# Altium PCB PCB1.PcbDoc (part 1 of 3)
Units mm, origin at the board's own origin, x right, y up, seen from the top; angles counter-clockwise.
Board outline 395.86 x 234.82 mm, 2 copper layers (Top Layer, Bottom Layer); 284 components, 215 nets, 949 pads, 803 vias.
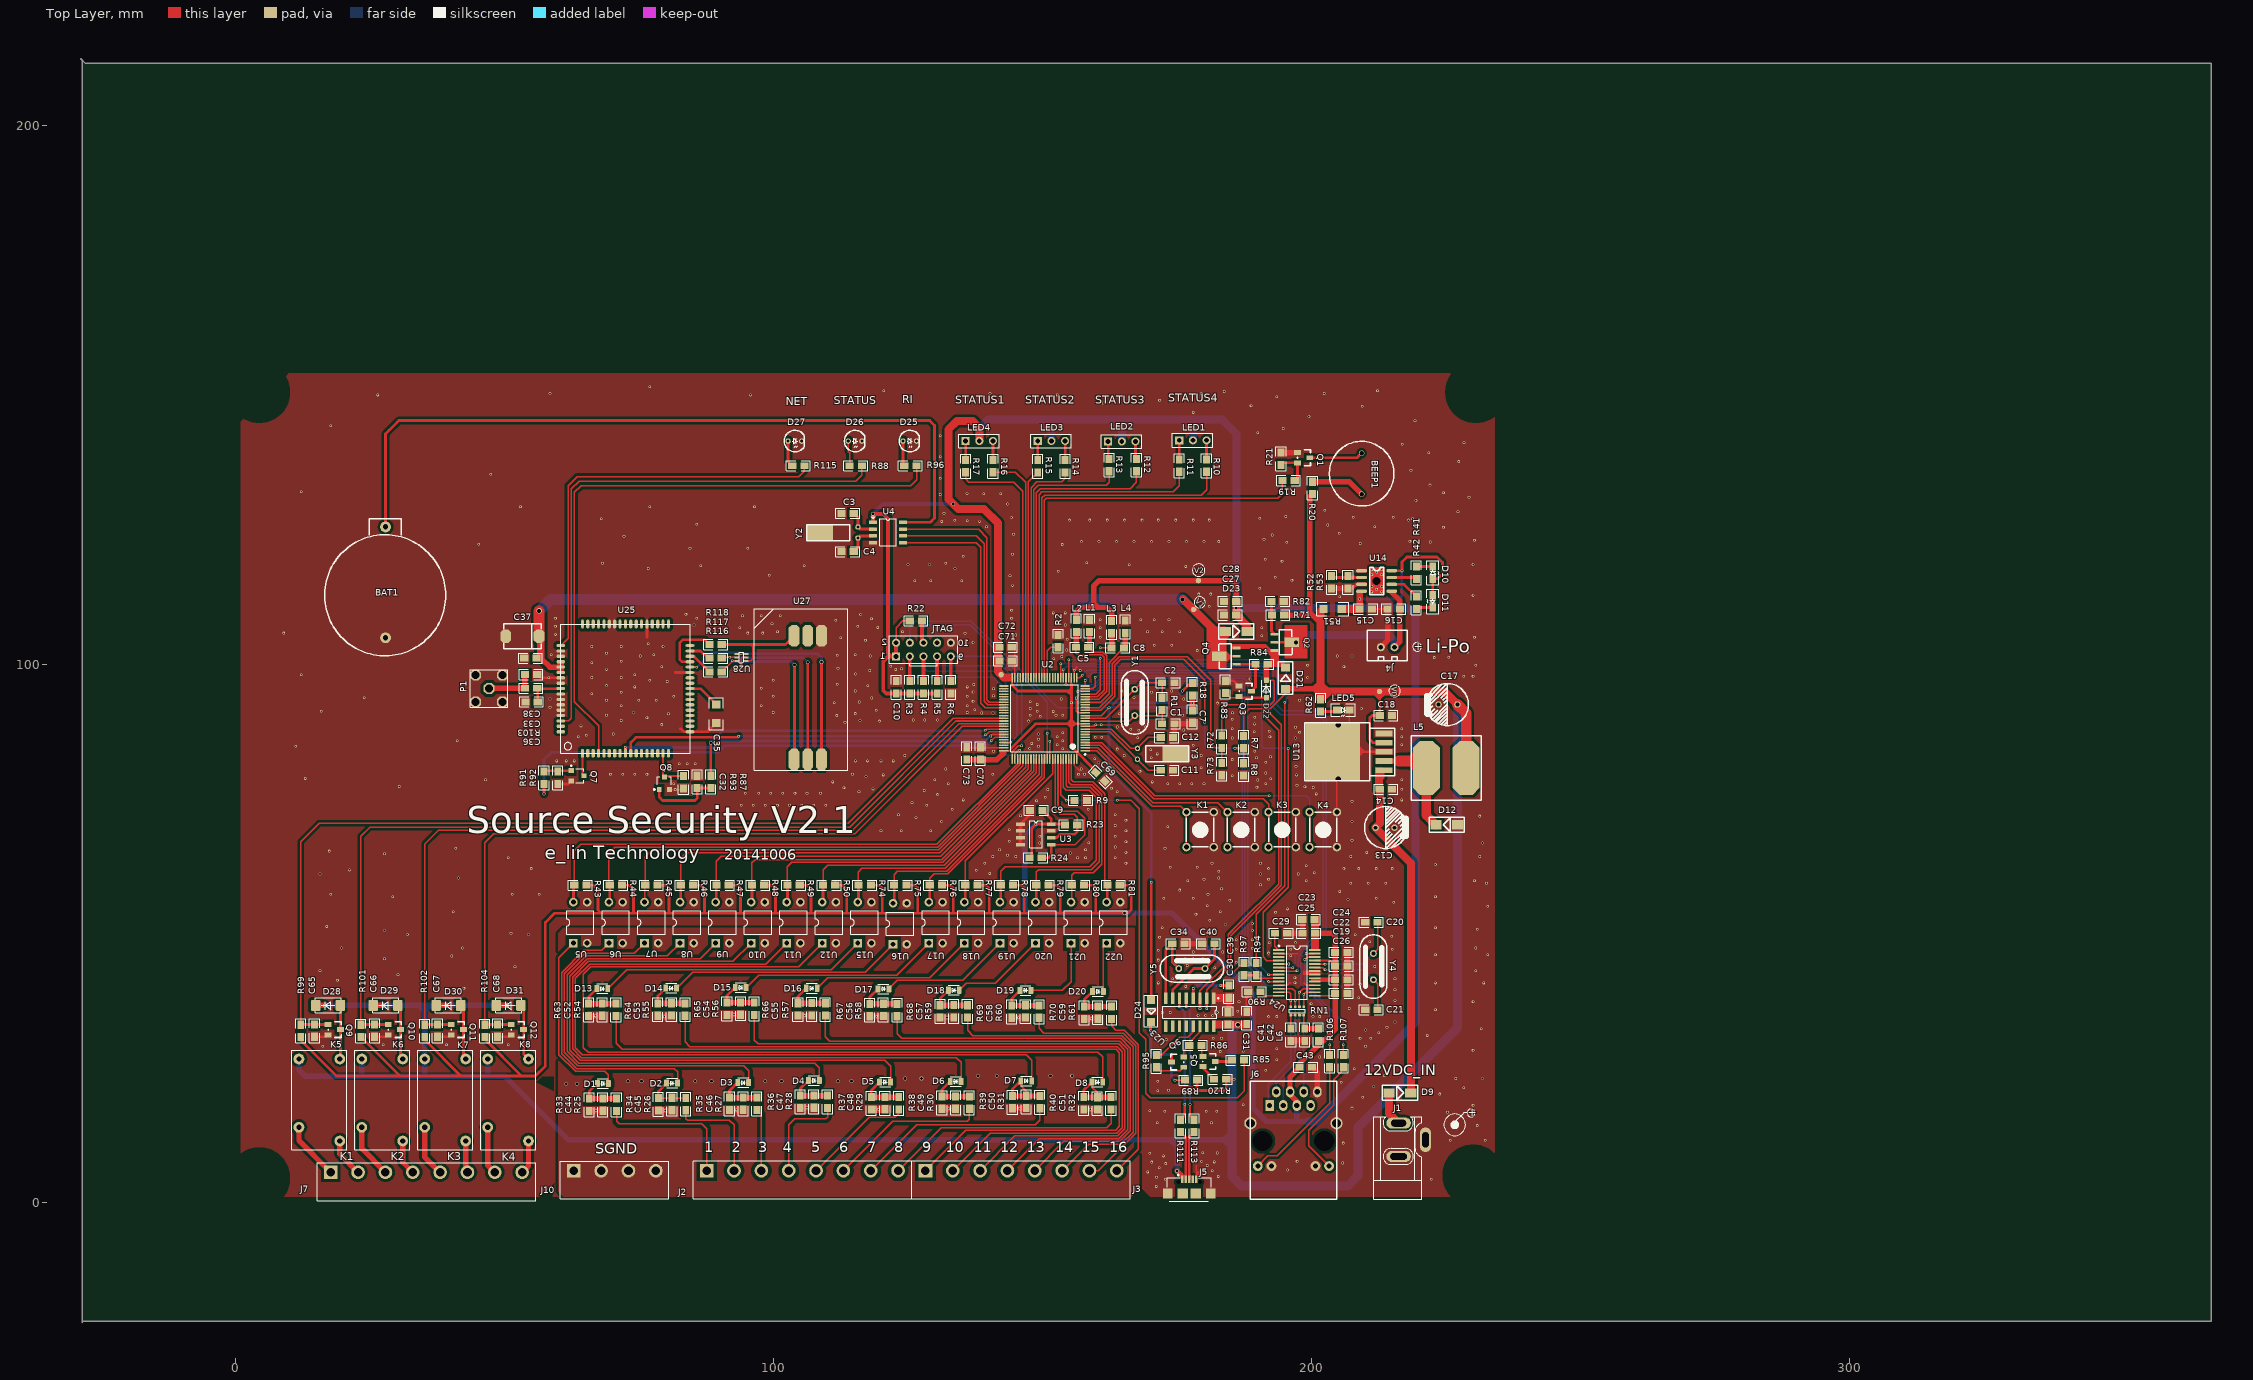
[diagram p0: Top Layer view]
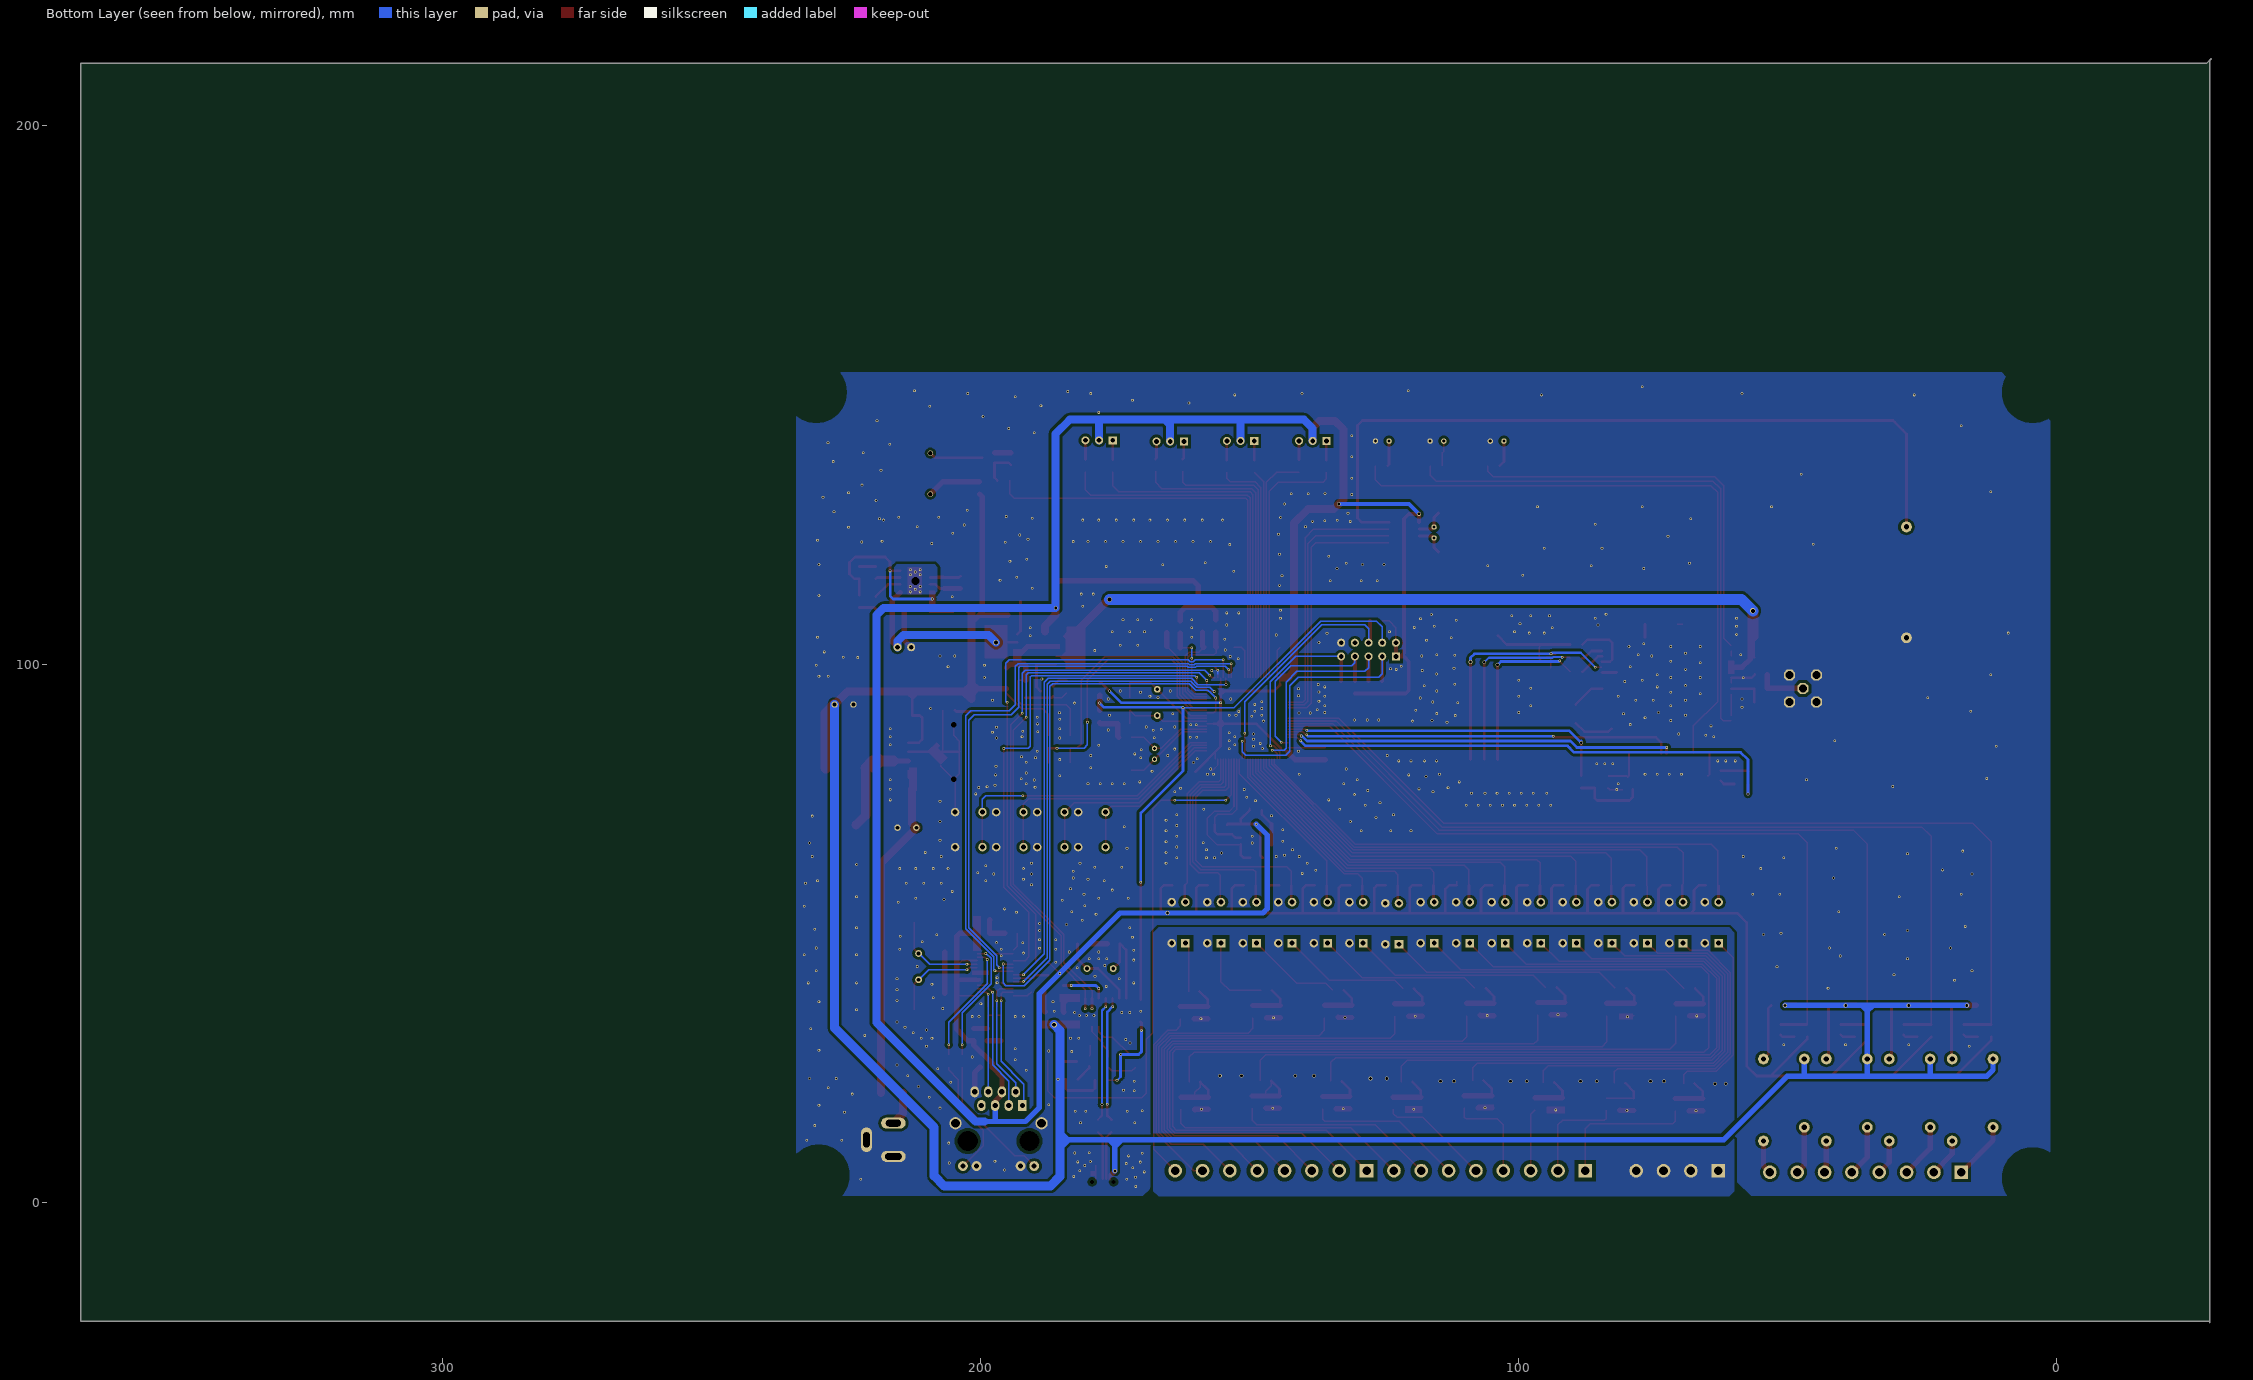
[diagram p1: Bottom Layer view, seen from below]

## Layer stack, top to bottom
Top Layer: signal copper 0.0356
Dielectric: dielectric 0.32, FR-4, Dk 4.8
Bottom Layer: signal copper 0.0356

## Board outline
-28.448,-22.352 -28.194,-22.098 367.157,-22.098 367.157,211.582 -27.813,211.582 -28.702,212.471 -28.448,212.217 -28.448,-22.352

## Design rules (kind name [scope] priority, off if disabled: settings)
Clearance [All] p1: gap=0.1
PlaneClearance [All] p1: clearance=0.7
PlaneConnect [All] p1: planeconnectstyle=Direct reliefexpansion=0.508 reliefentries=4 reliefconductorwidth=0.254 reliefairgap=0.254
PolygonConnect [All] p1: connectstyle=Direct reliefconductorwidth=0.254 reliefentries=4 polygonreliefangle="90 Angle"
RoutingVias [All] p1: holewidth=0.3 width=0.5 viastyle="Through Hole" minholewidth=0.3 minwidth=0.5 maxholewidth=0.7 maxwidth=1
SilkscreenOverComponentPads [All] p1: minsilkscreentomaskgap=0.254
SolderMaskExpansion [All] p1: expansion=0.102
Width [All] p1: maxlimit=5 minlimit=0.254 preferedwidth=0.254
25 further rules are at their usual default settings.

## Components (designator, comment, footprint, x,y, rotation, side; value= is the part's Value field where it differs from the comment)
BAT1 "BATT" CR2032 27.94,125.476 r0 top locked
BEEP1 "BEEP" BEEP-12 209.296,131.572 r90 top locked
C1 "22p" 0805 172.212,88.9 r0 top locked
C2 "22p" 0805 172.212,96.52 r0 top locked
C3 "104" 0805 112.656,127.996 r0 top locked
C4 "104" 0805 112.656,120.884 r0 top locked
C5 "104" 0805 158.496,103.124 r180 top locked
C7 "104" 0805 177.848,89.091 r90 top locked
C8 "104" 0805 162.844,102.996 r0 top locked
C9 "104" 0805 149.988,72.81 r180 top locked
C10 "104" 0805 122.82,94.548 r90 top locked
C11 "104" 0805 174.244,80.264 r180 top locked
C12 "104" 0805 174.244,86.36 r180 top locked
C13 "220uF" RB3.5 215.392,69.596 r180 top locked
C14 "0.1uF" 0805 214.952,76.732 r180 top locked
C15 "10uF/25V" 0805 208.915,110.236 r0 top locked
C16 "10uF/25V" 0805 216.408,110.236 r180 top locked
C17 "470uF" RB3.5 223.588,92.48 r0 top locked
C18 "0.1uF" 0805 214.952,90.448 r180 top locked
C19 "0.1uF" 0805 204.368,41.348 r0 top locked
C20 "20pF" 0805 209.956,52.016 r0 top locked
C21 "20pF" 0805 209.956,35.76 r0 top locked
C22 "0.1uF" 0805 204.368,43.888 r0 top locked
C23 "10uF" 0805 198.272,52.524 r0 top locked
C24 "0.1uF" 0805 204.368,46.428 r0 top locked
C25 "0.1uF" 0805 200.6,49.984 r180 top locked
C26 "0.1uF" 0805 204.368,38.808 r0 top locked
C27 "10uF/25V" 0805 186.012,109.098 r180 top locked
C28 "0.1uF" 0805 186.012,111.638 r180 top locked
C29 "10uF" 0805 193.192,49.984 r0 top locked
C30 "10uF" 0805 184.464,35.292 r270 top locked
C31 "0.1uF" 0805 187.96,35.392 r270 top locked
C32 "104" 0805 83.296,76.9 r90 top locked
C33 "NC" 0805 53.832,98.044 r0 top locked
C34 "22pF" 0805 176.38,48.044 r180 top locked
C35 "10uF/25V" 1206 89.392,92.456 r270 top locked
C36 "NC" 0805 56.2,92.964 r180 top locked
C37 "1000uF/6.3V" 7343 56.372,105.156 r180 top locked
C38 "0.1uF" 0805 56,101.092 r180 top locked
C39 "0.1uF" 0805 184.62,38 r90 top locked
C40 "22pF" 0805 181.968,48.044 r180 top locked
C41 "0.01uF" 0805 196.18,32.276 r270 top locked
C42 "0.01uF" 0805 198.72,32.276 r270 top locked
C43 "0.1uF" 0805 197.764,25.092 r0 top locked
C44 "0.1uF" 0805 68.32,19.282 r270 top locked
C45 "0.1uF" 0805 81.172,19.4 r270 top locked
C46 "0.1uF" 0805 94.384,19.458 r270 top locked
C47 "0.1uF" 0805 107.524,19.834 r270 top locked
C48 "0.1uF" 0805 120.744,19.558 r270 top locked
C49 "0.1uF" 0805 133.864,19.658 r270 top locked
C50 "0.1uF" 0805 146.972,19.808 r270 top locked
C51 "0.1uF" 0805 160.188,19.5 r270 top locked
C52 "0.1uF" 0805 68.216,36.934 r270 top locked
C53 "0.1uF" 0805 81.064,36.966 r270 top locked
C54 "0.1uF" 0805 93.916,37.134 r270 top locked
C55 "0.1uF" 0805 107.116,37.002 r270 top locked
C56 "0.1uF" 0805 120.44,36.882 r270 top locked
C57 "0.1uF" 0805 133.508,36.634 r270 top locked
C58 "0.1uF" 0805 146.836,36.59 r270 top locked
C59 "0.1uF" 0805 160.292,36.39 r270 top locked
C65 "0.1uF" 0805 14.732,33.02 r270 top locked
C66 "0.1uF" 0805 25.908,33.02 r270 top locked
C67 "0.1uF" 0805 37.592,33.02 r270 top locked
C68 "0.1uF" 0805 48.768,33.02 r270 top locked (schematic designator C568)
C69 "0.1uF" 0805 161.544,78.232 r135 top locked
C70 "0.1uF" 0805 138.455,84.531 r270 top locked
C71 "0.1uF" 0805 144.272,100.584 r180 top locked
C72 "10uF/25V" 0805 144.272,103.124 r180 top locked
C73 "10uF/25V" 0805 135.915,84.531 r270 top locked
D1 "LED-R" 0805-LED 68.32,22.064 r0 top locked
D2 "LED-R" 0805-LED 81.172,22.14 r0 top locked
D3 "LED-R" 0805-LED 94.384,22.24 r0 top locked
D4 "LED-R" 0805-LED 107.524,22.616 r0 top locked
D5 "LED-R" 0805-LED 120.744,22.34 r0 top locked
D6 "LED-R" 0805-LED 133.864,22.44 r0 top locked
D7 "LED-R" 0805-LED 146.972,22.548 r0 top locked
D8 "LED-R" 0805-LED 160.188,22.34 r0 top locked
D9 "B340" SMB 214.376,20.32 r0 top locked
D10 "RED" LED-0805 222.504,115.824 r90 top locked
D11 "GREEN" LED-0805 222.504,112.776 r270 top locked
D12 "B340" SMB 227.144,70.128 r180 top locked
D13 "LED-R" 0805-LED 68.216,39.7 r0 top locked
D14 "LED-R" 0805-LED 81.004,39.78 r0 top locked
D15 "LED-R" 0805-LED 93.916,39.9 r0 top locked
D16 "LED-R" 0805-LED 107.116,39.768 r0 top locked
D17 "LED-R" 0805-LED 120.44,39.648 r0 top locked
D18 "LED-R" 0805-LED 133.524,39.4 r0 top locked
D19 "LED-R" 0805-LED 146.836,39.356 r0 top locked
D20 "LED-R" 0805-LED 160.292,39.156 r0 top locked
D21 "IN4007" SMA(DO-214AC) 195.156,95.382 r90 top locked
D22 "2.7V" sod-123 191.6,95.382 r90 top locked
D23 "B340" SMB 183.98,106.05 r0 top locked
D24 "IN4148" SOD-23 170.18,38.608 r270 top locked
D25 "LED-R" LED-DIP 124.312,141.424 r0 top locked
D26 "LED-R" LED-DIP 114.152,141.424 r0 top locked
D27 "LED-R" LED-DIP 102.976,141.424 r0 top locked
D28 "1N4007" DO-214AC(SMA) 17.272,36.576 r180 top locked
D29 "1N4007" DO-214AC(SMA) 27.94,36.576 r180 top locked
D30 "1N4007" DO-214AC(SMA) 39.624,36.576 r180 top locked
D31 "1N4007" DO-214AC(SMA) 50.8,36.576 r180 top locked
J1 "POWER" DC10B 220.472,4.064 r90 top locked
J2 "2EDGR-5.08-8P" 2EDGR-5.08-8P 85.104,7.62 r0 top locked
J3 "2EDGR-5.08-8P" 2EDGR-5.08-8P 125.744,7.62 r0 top locked
J4 "SIP2A-2.54" 2.54 210.312,100.584 r0 top locked
J5 "microb usb" USB_micro 177.252,1.624 r0 top locked
J6 "HR911105A" HR911105A 192.176,17.98 r270 top locked
J7 "2EDGR-5.08-8P" 2EDGR-5.08-8P 15.256,7.32 r0 top locked
J10 "2EDGR-5.08-4P" 2EDGR-5.08-4P 60.452,7.62 r0 top locked
JTAG "JTAG_10" JTAG_10 122.8,101.42 r0 top locked (schematic designator JTAG_1)
K1 "KEY_M" KEY_M 181.828,72.484 r270 top locked
K2 "KEY_M" KEY_M 189.448,72.484 r270 top locked
K3 "KEY_M" KEY_M 197.068,72.484 r270 top locked
K4 "KEY_M" KEY_M 204.688,72.484 r270 top locked
K5 "307" RELAY-SONGCHUAN 11.848,26.624 r270 top locked
K6 "307" RELAY-SONGCHUAN 23.532,26.624 r270 top locked
K7 "307" RELAY-SONGCHUAN 35.216,26.624 r270 top locked
K8 "307" RELAY-SONGCHUAN 46.9,26.624 r270 top locked
L1 "100uH" 0805 158.732,108.212 r270 top locked
L2 "100uH" 0805 156.296,108.228 r270 top locked
L3 "100uH" 0805 162.844,105.704 r90 top locked
L4 "100uH" 0805 165.384,108.076 r270 top locked
L5 "33uH" INDUCTOR-1212 218.508,74.7 r0 top locked
L6 "82uH" 0805 201.26,32.276 r270 top locked
LED1 "Header 3" HDR1X3 175.4,141.568 r0 top locked
LED2 "Header 3" HDR1X3 162.192,141.376 r0 top locked
LED3 "Header 3" HDR1X3 149.116,141.448 r0 top locked
LED4 "Header 3" HDR1X3 135.716,141.468 r0 top locked
LED5 "LED-R" LED-0805 204.724,91.44 r0 top locked
P1 "COAX-M" ST-TH1 43.672,91.948 r0 top locked
Q1 "3904" SOT-23 197.368,139.276 r270 top locked
Q2 "2SJ517" SOT-89 193.124,105.542 r270 top locked
Q3 "3904" SOT-23 186.52,95.89 r270 top locked
Q4 "2SJ517" SOT-89 186.012,99.954 r90 top locked
Q5 "3906" SOT-23 179.796,27.116 r270 top locked
Q6 "3904" SOT-23 176.24,25.084 r90 top locked
Q7 "3904" SOT-23R 63.484,79.248 r270 top locked
Q8 "3904" SOT-23R 79.74,77.724 r0 top locked
Q9 "3904" SOT-23 17.272,33.02 r270 top locked
Q10 "3904" SOT-23 28.448,33.02 r270 top locked
Q11 "3904" SOT-23 40.132,33.02 r270 top locked
Q12 "3904" SOT-23 51.308,33.02 r270 top locked
R1 "1M" 0805 172.212,91.44 r90 top locked
R2 "10K" 0805 152.908,103.124 r90 top locked
R3 "10K" 0805 125.36,94.548 r90 top locked
R4 "10K" 0805 127.9,94.548 r90 top locked
R5 "10K" 0805 130.44,94.548 r90 top locked
R6 "10K" 0805 132.98,96.84 r270 top locked
R7 "10K" 0805 187.363,84.364 r90 top locked
R8 "10K" 0805 187.363,79.284 r90 top locked
R9 "10K" 0805 155.956,74.676 r0 top locked
R10 "510R" 0805 180.48,138.012 r270 top locked
R11 "510R" 0805 175.4,138.012 r270 top locked
R12 "10K" 0805 167.46,138.108 r270 top locked
R13 "10K" 0805 162.38,138.108 r270 top locked
R14 "10K" 0805 154.196,137.892 r270 top locked
R15 "10K" 0805 149.116,137.892 r270 top locked
R16 "10K" 0805 140.796,137.912 r270 top locked
R17 "10K" 0805 135.716,137.912 r270 top locked
R18 "10K" 0805 177.848,94.171 r90 top locked
R19 "1K" 0805 194.564,134.112 r0 top locked
R20 "270" 0805 200.152,131.572 r90 top locked
R21 "10K" 0805 194.32,139.276 r270 top locked
R22 "10K" 0805 125.34,108.024 r0 top locked
R23 "4.7K" 0805 156.464,70.104 r180 top locked
R24 "4.7K" 0805 149.86,64.008 r180 top locked
R25 "1.5K" 0805 70.86,16.984 r90 top locked
R26 "1.5K" 0805 83.712,17.1 r90 top locked
R27 "1.5K" 0805 96.924,17.16 r90 top locked
R28 "1.5K" 0805 110.064,17.536 r90 top locked
R29 "1.5K" 0805 123.284,17.26 r90 top locked
R30 "1.5K" 0805 136.404,17.36 r90 top locked
R31 "1.5K" 0805 149.512,17.468 r90 top locked
R32 "1.5K" 0805 162.728,17.26 r90 top locked
R33 "1K" 0805 65.78,16.984 r90 top locked
R34 "1K" 0805 78.632,17.06 r90 top locked
R35 "1K" 0805 91.844,17.16 r90 top locked
R36 "1K" 0805 104.984,17.536 r90 top locked
R37 "1K" 0805 118.204,17.26 r90 top locked
R38 "1K" 0805 131.324,17.36 r90 top locked
R39 "1K" 0805 144.432,17.468 r90 top locked
R40 "1K" 0805 157.648,17.26 r90 top locked
R41 "1K" 0805 219.456,115.824 r90 top locked
R42 "1K" 0805 219.456,110.236 r90 top locked
R43 "4.7K" 0805 62.992,58.928 r0 top locked
R44 "4.7K" 0805 69.596,58.928 r0 top locked
R45 "4.7K" 0805 76.2,58.928 r0 top locked
R46 "4.7K" 0805 82.804,58.928 r0 top locked
R47 "4.7K" 0805 89.408,58.928 r0 top locked
R48 "4.7K" 0805 96.012,58.928 r0 top locked
R49 "4.7K" 0805 102.616,58.928 r0 top locked
R50 "4.7K" 0805 109.22,58.928 r0 top locked
R51 "0.4" 1206 202.184,110.236 r0 top locked
R52 "2.7K" 0805 203.708,116.332 r270 top locked
R53 "2.7K" 0805 206.756,116.332 r270 top locked
R54 "1.5K" 0805 70.756,34.62 r90 top locked
R55 "1.5K" 0805 83.604,34.668 r90 top locked
R56 "1.5K" 0805 96.456,34.82 r90 top locked
R57 "1.5K" 0805 109.656,34.688 r90 top locked
R58 "1.5K" 0805 122.98,34.568 r90 top locked
R59 "1.5K" 0805 136.064,34.32 r90 top locked
R60 "1.5K" 0805 149.376,34.276 r90 top locked
R61 "1.5K" 0805 162.832,34.076 r90 top locked
R62 "1K" 0805 201.676,93.472 r270 top locked
R63 "1K" 0805 65.676,34.62 r90 top locked
R64 "1K" 0805 78.524,34.668 r90 top locked
R65 "1K" 0805 91.376,34.82 r90 top locked
R66 "1K" 0805 104.576,34.688 r90 top locked
R67 "1K" 0805 117.9,34.568 r90 top locked
R68 "1K" 0805 130.984,34.32 r90 top locked
R69 "1K" 0805 144.296,34.276 r90 top locked
R70 "1K" 0805 157.752,34.076 r90 top locked
R71 "100" 0805 192.616,109.098 r0 top locked
R72 "10K" 0805 183.303,84.424 r90 top locked
R73 "10K" 0805 183.303,79.344 r90 top locked
R74 "4.7K" 0805 115.824,58.928 r0 top locked
R75 "4.7K" 0805 122.428,58.928 r0 top locked
R76 "4.7K" 0805 129.032,58.928 r0 top locked
R77 "4.7K" 0805 135.636,58.928 r0 top locked
R78 "4.7K" 0805 142.24,58.928 r0 top locked
R79 "4.7K" 0805 148.844,58.928 r0 top locked
R80 "4.7K" 0805 155.448,58.928 r0 top locked
R81 "4.7K" 0805 162.052,58.928 r0 top locked
R82 "5.6K" 0805 194.832,111.638 r180 top locked
R83 "100" 0805 183.98,96.906 r270 top locked
R84 "2.7K" 0805 189.568,99.954 r0 top locked
R85 "1K" 0805 187.452,26.416 r180 top locked
R86 "1K" 0805 177.256,29.148 r0 top locked
R87 "4.7K" 0805 88.376,79.248 r270 top locked
R88 "1K" 0805 114.152,136.852 r0 top locked
R89 "2K" 0805 176.456,22.692 r0 top locked
R90 "2K" 0805 190.5,39.116 r180 top locked
R91 "4.7K" 0805 57.388,77.724 r90 top locked
R92 "47K" 0805 59.928,77.724 r90 top locked
R93 "47K" 0805 85.836,79.248 r270 top locked
R94 "0" 0805 189.7,42.164 r90 top locked
R95 "1K" 0805 171.16,25.084 r90 top locked
R96 "1K" 0805 124.312,136.852 r0 top locked
R97 "10K" 0805 187.452,42.164 r90 top locked
R99 "10K" 0805 12.192,30.7 r90 top locked
R101 "10K" 0805 23.352,30.692 r90 top locked
R102 "10K" 0805 35.228,30.684 r90 top locked
R103 "0R" 0805 53.832,95.504 r0 top locked
R104 "10K" 0805 46.392,30.688 r90 top locked
R106 "270" 0805 203.352,25.092 r90 top locked
R107 "270" 0805 205.892,25.092 r90 top locked
R111 "0" 0805 175.636,15.34 r270 top locked
R113 "0" 0805 178.176,15.34 r270 top locked
R115 "1K" 0805 103.484,136.852 r0 top locked
R116 "22" 0805 90.408,98.552 r180 top locked
R117 "22" 0805 90.408,101.092 r180 top locked
R118 "22" 0805 90.408,103.632 r180 top locked
R120 "4.7K" 0805 181.864,22.86 r0 top locked
RN1 "51R" 0603-4 195.732,34.744 r0 top locked
U2 "STM32F103VET6" LQFP100_N 150.368,89.916 r180 top locked
U3 "24C02" SOP-8#1 145.924,70.27 r0 top locked
U4 "DS1302" SOP-8#2 121.292,124.44 r0 top locked
U5 "TLP521-1" DIP4 62.844,48.148 r90 top locked
U6 "TLP521-1" DIP4 69.448,48.148 r90 top locked
U7 "TLP521-1" DIP4 76.052,48.148 r90 top locked
U8 "TLP521-1" DIP4 82.656,48.148 r90 top locked
U9 "TLP521-1" DIP4 89.26,48.148 r90 top locked
U10 "TLP521-1" DIP4 95.864,48.148 r90 top locked
U11 "TLP521-1" DIP4 102.468,48.148 r90 top locked
U12 "TLP521-1" DIP4 109.072,48.148 r90 top locked
U13 "LM2596S_5.0" TO-263-5 213.428,80.288 r0 top locked
U14 "TP4056" SO8E 209.296,117.348 r0 top locked
U15 "TLP521-1" DIP4 115.676,48.148 r90 top locked
U16 "TLP521-1" DIP4 122.228,47.936 r90 top locked
U17 "TLP521-1" DIP4 128.884,48.148 r90 top locked
U18 "TLP521-1" DIP4 135.488,48.148 r90 top locked
U19 "TLP521-1" DIP4 142.092,48.148 r90 top locked
U20 "TLP521-1" DIP4 148.696,48.148 r90 top locked
U21 "TLP521-1" DIP4 155.3,48.148 r90 top locked
U22 "TLP521-1" DIP4 161.904,48.148 r90 top locked
U23 "CH340" SOP16 177.352,35.292 r180 top locked
U24 "ENC28J60" ssop28 193.916,46.864 r0 top locked
U25 "SIM900" SIM-900 84.508,83.432 r90 top locked
U27 "SIM" sim-6p 113.776,80.264 r90 top locked
U28 "SMF05" SC70-6L 94.98,100.584 r180 top locked
Y1 "8MHz" XTAL_US 167.132,90.424 r90 top locked
Y2 "32.768KHz" cs-308 114.18,122.916 r180 top locked
Y3 "32.768KHZ" CS-308 169.164,84.836 r0 top locked
Y4 "25M" XTAL_US 211.48,41.348 r90 top locked
Y5 "12M" XTAL_US 175.32,43.42 r0 top locked

## Footprints (in the part's own frame and the unit in brackets; to place one, negate y for a bottom-side part, rotate by r counter-clockwise, add the part's x,y. Pads: shape width x height; smd on the part's side, far side on the other; paste and mask are expansions set on the pad)
2.54 [mm]
  round 1.5 hole 0.9: 1(5.08,2.54) 2(2.54,2.54)
  silkscreen extent 0,0 7.5,5.7
2EDGR-5.08-4P [mm]
  rect 2.54x2.54 hole 1.6: 1(2.461,-1.772)
  round 2.54 hole 1.6: 2(7.541,-1.772) 3(12.621,-1.772) 4(17.701,-1.772)
  silkscreen extent -0.08,-7 20.1,0.03
2EDGR-5.08-8P [mm] "接插件"
  rect 2.54x2.54 hole 1.6: 1(2.5,-1.75)
  round 2.54 hole 1.6: 2(7.58,-1.75) 3(12.66,-1.75) 4(17.74,-1.75) 5(22.82,-1.75) 6(27.9,-1.75) 7(32.98,-1.75) 8(38.06,-1.75)
  silkscreen extent -0.04,-7 40.6,0.05
0603-4 [mm]
  rect 0.5x0.5 smd: 1(0.4,0) 2(0.4,1.6) 3(1.2,0) 4(1.2,1.6) 5(2,0) 6(2,1.6) 7(2.8,0) 8(2.8,1.6)
  silkscreen extent 0.1,0.5 3.1,1.1
0805 [mil]
  rect 60x50 smd: 1(0,0) 2(90,0)
  silkscreen extent -42,-37 132,37
0805-LED [mil]
  rrect25% 35x52 smd: 1(-40,0) 2(40,0)
  silkscreen extent -40,-35 40,35, body extent -40,-25 40,24, height 43
1206 [mil]
  rect 60x60 smd: 1(0,0) 2(135,0)
  silkscreen extent -50,-50 185,50
7343 [mm]
  oct 2x2.5 smd: 1(-0.1,0) 2(6.1,0)
  silkscreen extent -0.5,-2.3 6.5,2.3
BEEP-12 [mm]
  round 1 hole 0.8: 1(0,0) 2(7.6,0)
  silkscreen extent -2.2,-6 9.8,6
CR2032 [mm]
  round 2 hole 1: 1(0,0) 2(0,-20.6)
  silkscreen extent -11.32,-23.95 11.18,1.52
cs-308 [mm]
  round 1 hole 0.6: 1(-1.524,-0.508) 2(-1.524,-2.54)
  rect 5x3 smd: 3(5.588,-1.524)
  silkscreen extent 0,-3 8,0
CS-308 [mm]
  round 1 hole 0.6: 1(-1.524,-0.508) 2(-1.524,-2.54)
  rect 5x3 smd: 3(5.588,-1.524)
  silkscreen extent 0,-3 8,0
DC10B [mil]
  oval 80x180 hole 50 slot 110 at 90 deg: 1(419.09,170)
  oval 80x180 hole 50 slot 120 at 90 deg: 2(175,170)
  oval 180x80 hole 50 slot 110 at 0 deg: 3(297.05,-26.85)
  silkscreen extent -138,0 465,350
DIP4 [mm]
  rect 1.6x1.6 hole 0.9: 1(0,0)
  round 1.6 hole 0.9: 2(0,-2.54) 3(7.62,-2.54) 4(7.62,0)
  silkscreen extent 1.64,-3.81 5.99,1.27
DO-214AC(SMA) [mil]
  rrect25% 70x80 smd: 1(-90,0) 2(90,0)
  silkscreen extent -95,-55 95,55, body extent -108,-55 108,55, height 91
HDR1X3 [mm]
  rect 1.5x1.5 hole 0.9: 1(0,0)
  round 1.5 hole 0.9: 2(2.54,0) 3(5.08,0)
  silkscreen extent -1.27,-1.27 6.25,1.27
HR911105A [mil]
  rect 80x62 hole 40: 1(0,0)
  oval 80x62 hole 40: 2(-100,50) 3(0,100) 4(-100,150) 5(0,200) 6(-100,250) 7(0,300) 8(-100,350)
  round 72 hole 36: 9(442.91,-85.63) 10(442.91,14) 11(442.91,335.87) 12(442.91,436)
  round 90 hole 65: 13(129.92,-139.76) 14(129.92,490.16)
  round 0 hole 149.61: ""(259.84,401.58) ""(259.84,-51.18)
  silkscreen extent -179,-140 687,490
INDUCTOR-1212 [mm]
  oct 5x10 smd: 1(2.8,6) 2(10.2,6)
  silkscreen extent 0,0 13,12
JTAG_10 [mm]
  rect 1.5x1.5 hole 0.9: 1(0,0)
  round 1.5 hole 0.9: 2(0,2.54) 3(2.54,0) 4(2.54,2.54) 5(5.08,0) 6(5.08,2.54) 7(7.62,0) 8(7.62,2.54) 9(10.16,0) 10(10.16,2.54)
  silkscreen extent -1.27,-1.78 11.43,3.81
KEY_M [mil]
  round 62 hole 38: 1(0,0) 1(255.9,0) 2(0,-200) 2(255.9,-200)
  silkscreen extent 0,-200 255,0
LED-0805 [mil]
  rect 60x50 smd: 1(0,0) 2(90,0)
  silkscreen extent -43,-46 134,45
LED-DIP [mm]
  round 1 hole 0.6: 1(-0.25,0) 2(2.29,0)
  silkscreen extent -0.95,-2 2.78,2
LQFP100_N [mm] "Thin QFP, 100-Leads, Body 14x14mm, Pitch 0.5mm, IPC Medium Density"
  oval 1.8x0.3 smd: 1(-7.55,6) 2(-7.55,5.5) 3(-7.55,5) 4(-7.55,4.5) 5(-7.55,4) 6(-7.55,3.5) 7(-7.55,3) 8(-7.55,2.5) 9(-7.55,2) 10(-7.55,1.5) 11(-7.55,1) 12(-7.55,0.5) 13(-7.55,0) 14(-7.55,-0.5) 15(-7.55,-1) 16(-7.55,-1.5) 17(-7.55,-2) 18(-7.55,-2.5) 19(-7.55,-3) 20(-7.55,-3.5) 21(-7.55,-4) 22(-7.55,-4.5) 23(-7.55,-5) 24(-7.55,-5.5) 25(-7.55,-6) 51(7.55,-6) 52(7.55,-5.5) 53(7.55,-5) 54(7.55,-4.5) 55(7.55,-4) 56(7.55,-3.5) 57(7.55,-3) 58(7.55,-2.5) 59(7.55,-2) 60(7.55,-1.5) 61(7.55,-1) 62(7.55,-0.5) 63(7.55,0) 64(7.55,0.5) 65(7.55,1) 66(7.55,1.5) 67(7.55,2) 68(7.55,2.5) 69(7.55,3) 70(7.55,3.5) 71(7.55,4) 72(7.55,4.5) 73(7.55,5) 74(7.55,5.5) 75(7.55,6)
  oval 0.3x1.8 smd: 26(-6,-7.55) 27(-5.5,-7.55) 28(-5,-7.55) 29(-4.5,-7.55) 30(-4,-7.55) 31(-3.5,-7.55) 32(-3,-7.55) 33(-2.5,-7.55) 34(-2,-7.55) 35(-1.5,-7.55) 36(-1,-7.55) 37(-0.5,-7.55) 38(0,-7.55) 39(0.5,-7.55) 40(1,-7.55) 41(1.5,-7.55) 42(2,-7.55) 43(2.5,-7.55) 44(3,-7.55) 45(3.5,-7.55) 46(4,-7.55) 47(4.5,-7.55) 48(5,-7.55) 49(5.5,-7.55) 50(6,-7.55) 76(6,7.55) 77(5.5,7.55) 78(5,7.55) 79(4.5,7.55) 80(4,7.55) 81(3.5,7.55) 82(3,7.55) 83(2.5,7.55) 84(2,7.55) 85(1.5,7.55) 86(1,7.55) 87(0.5,7.55) 88(0,7.55) 89(-0.5,7.55) 90(-1,7.55) 91(-1.5,7.55) 92(-2,7.55) 93(-2.5,7.55) 94(-3,7.55) 95(-3.5,7.55) 96(-4,7.55) 97(-4.5,7.55) 98(-5,7.55) 99(-5.5,7.55) 100(-6,7.55)
  silkscreen extent -7.68,-6.25 6.25,6.82, body extent -7,-7 7,7, height 1.6
RB3.5 [mm]
  round 1.2 hole 0.711: 1(3.5,0) 2(0,0)
  silkscreen extent -2.34,-4.02 5.54,3.93
RELAY-SONGCHUAN [mm]
  round 2 hole 1: 1(12.7,0) 2(15.24,7.6) 3(0,7.6) 4(0,0)
  silkscreen extent -1.6,-1.3 16.84,8.9
SC70-6L [mm]
  oct 0.85x0.4 smd: 1(0,0) 2(0,-0.65) 3(0,-1.3) 4(1.829,-1.3) 5(1.829,-0.65) 6(1.829,0)
  silkscreen extent 0.51,-1.64 1.32,0.36
sim-6p [mm]
  oct 4x2 smd: 1(25,9.93) 2(25,7.39) 3(25,4.85) 4(2,9.93) 5(2,7.39) 6(2,4.85)
  silkscreen extent 0,0 30,17.3
SIM-900 [mm]
  oct 1.6x0.6 smd: 1(0,20) 2(0,19) 3(0,18) 4(0,17) 5(0,16) 6(0,15) 7(0,14) 8(0,13) 9(0,12) 10(0,11) 11(0,10) 12(0,9) 13(0,8) 14(0,7) 15(0,6) 16(0,5) 17(0,4) 35(24,4) 36(24,5) 37(24,6) 38(24,7) 39(24,8) 40(24,9) 41(24,10) 42(24,11) 43(24,12) 44(24,13) 45(24,14) 46(24,15) 47(24,16) 48(24,17) 49(24,18) 50(24,19) 51(24,20)
  oct 0.6x1.6 smd: 18(4,0) 19(5,0) 20(6,0) 21(7,0) 22(8,0) 23(9,0) 24(10,0) 25(11,0) 26(12,0) 27(13,0) 28(14,0) 29(15,0) 30(16,0) 31(17,0) 32(18,0) 33(19,0) 34(20,0) 52(20,24) 53(19,24) 54(18,24) 55(17,24) 56(16,24) 57(15,24) 58(14,24) 59(13,24) 60(12,24) 61(11,24) 62(10,24) 63(9,24) 64(8,24) 65(7,24) 66(6,24) 67(5,24) 68(4,24)
  silkscreen extent 0,0 24,24
SMA(DO-214AC) [mm]
  rect 1.5x1.6 smd: 1(0,0) 2(3.95,0)
  silkscreen extent -1,-1.38 5,1.37
SMB [mm]
  rect 2.1x1.7 smd: 1(0,0) 2(4.05,0)
  silkscreen extent -1.25,-1.4 5.3,1.4
SO8E [mil]
  oval 80x24 smd: 1(0,0) 2(0,-50) 3(0,-100) 4(0,-150) 5(220,-150) 6(220,-100) 7(220,-50) 8(220,0)
  round 0 hole 59.05: 9(110,-75)
  silkscreen extent 60,-175 160,25
SOD-23 [mm]
  rect 1.5x1.5 smd: 1(1.016,0) 2(5.1,0)
  silkscreen extent 0.12,-1.25 6,1.25
sod-123 [mil]
  rrect25% 40x35 smd: 1(-64,0) 2(64,0)
  silkscreen extent -62,-33 62,34, body extent -76,-33 76,34, height 56
SOP16 [mm]
  rect 0.6x2.2 smd: 1(-4.445,-2.6) 2(-3.175,-2.6) 3(-1.905,-2.6) 4(-0.635,-2.6) 5(0.635,-2.6) 6(1.905,-2.6) 7(3.175,-2.6) 8(4.445,-2.6) 9(4.445,2.6) 10(3.175,2.6) 11(1.905,2.6) 12(0.635,2.6) 13(-0.635,2.6) 14(-1.905,2.6) 15(-3.175,2.6) 16(-4.445,2.6)
  silkscreen extent -5.42,-2.72 5,1.1
SOP-8#1 [mil]
  rect 65x25 smd: 1(0,0) 2(0,-50) 3(0,-100) 4(0,-150) 5(224.41,-150) 6(224.41,-100) 7(224.41,-50) 8(224.41,0)
  silkscreen extent 65,-175 159,25
SOP-8#2 [mil]
  rrect25% 60x25 smd: 1(-110,75) 2(-110,25) 3(-110,-25) 4(-110,-75) 5(110,-75) 6(110,-25) 7(110,25) 8(110,75)
  silkscreen extent -125,-99 62,114, body extent -118,-98 118,99, height 69
SOT-23 [mil]
  rect 36x50 smd: 1(0,0) 2(75,0) 3(37.5,90)
  silkscreen extent -20,0 95,95
SOT-23R [mm]
  rect 0.9x0.95 smd: 1(0.95,-1.048) 2(-0.95,-1.048) 3(0,1.302)
  silkscreen extent -1.98,-1.17 1.3,1.3
SOT-89 [mm]
  rect 0.52x1.5 smd: 1(0,0) 2(1.5,0) 3(3,0)
  rect 1.8x2.7 smd: 4(1.5,3.2)
  silkscreen extent -0.8,0.9 3.8,3.25
ssop28 [mm]
  rect 2.15x0.305 smd: 1(0,0) 2(0,-0.65) 3(0,-1.3) 4(0,-1.95) 5(0,-2.6) 6(0,-3.25) 7(0,-3.9) 8(0,-4.55) 9(0,-5.2) 10(0,-5.85) 11(0,-6.552) 12(0,-7.202) 13(0,-7.852) 14(0,-8.502) 15(6.7,-8.502) 16(6.7,-7.852) 17(6.7,-7.202) 18(6.7,-6.552) 19(6.7,-5.85) 20(6.7,-5.252) 21(6.7,-4.55) 22(6.7,-3.9) 23(6.7,-3.25) 24(6.7,-2.6) 25(6.7,-1.95) 26(6.7,-1.3) 27(6.7,-0.65) 28(6.7,0)
  silkscreen extent -0.12,-9.14 5.22,0.9
ST-TH1 [mm]
  oct 2x2 hole 1.5: 1(3.5,3.5) 2(1,6) 3(6,6) 4(6,1) 5(1,1)
  silkscreen extent 0,0 7,7
TO-263-5 [mm]
  rect 3.176x1.07 smd: 1(0,0) 2(0,1.7) 3(0,3.4) 4(0,5.1) 5(0,6.8)
  round 0 hole 1.016: 6(-8.45,-1.695) 8(-8.45,8.465)
  rect 10.16x10.668 smd: 7(-9.5,3.404)
  silkscreen extent -14.73,-2 1.98,8.8
USB_micro [mm]
  rect 1.8x1.9 smd: 0(-4,0) 0(4,0)
  round 0 hole 0.7: 0(-2,2.15) 0(2,2.15)
  rect 1.9x1.9 smd: 0(-1.2,0) 0(1.2,0)
  rect 0.4x1.35 smd: 1(-1.3,2.675) 2(-0.65,2.675) 3(0,2.675) 4(0.65,2.675) 5(1.3,2.675)
  silkscreen extent -4.06,-1.45 4.06,3.55
XTAL_US [mil]
  round 50 hole 28: 1(0,0) 2(192.13,0)
  silkscreen extent -136,-98 328,98

## Part data
BAT1: library part BAT
C1 C2 C7 C9 C10: library part CAP, "陶瓷电容"
C3 C4 C11 C12 C14 C18 C32 C33 C36 C38: library part C
C5 C8 C13 C15 C16 C17 C19 C20 C21 C22 C24 C25 C26 C27 C28 C29 C31 C35 C37 C39 C41 C42 C43 C44 C45 C46 C47 C48 C49 C50 C51 C52 C53 C54 C55 C56 C57 C58 C59 C65 C66 C67 C68 C69 C70 C71 C72 C73: library part CAP
C23 C30 C34 C40: library part CAP, "0.1uF"
D1 D2 D3 D4 D5 D6 D7 D8 D13 D14 D15 D16 D17 D18 D19 D20 D25 D26 D27 LED5: library part LED-RED, "红色LED"
D9: library part 1N5824(SS54), "肖特基二极管"
D10 D11: library part LED
D12 D21 D23 D24: library part DIODE
D22: library part 1N5824(SS54), "3V稳压管"
D28 D29 D30 D31: "1A整流二极管"
J1: library part POW
J2 J3 J7: "端子"
J4: library part SIP2A-2.50（带槽）
J10: library part SIP4A-2.50(带槽)
K5 K6 K7 K8: library part JDQ_307, "继电器"
L1 L2 L3 L4 L5 L6: library part INDUCTOR
LED1 LED2 LED3 LED4: "Header, 3-Pin"
P1: "SMA-J-P-H-ST-TH1"
Q1 Q3 Q7 Q8: library part NPN, "8050/BCW846/BCW847"
Q2 Q4: library part "MOSFET P_1"
Q5: library part PNP1
Q6 Q9 Q10 Q11 Q12: library part NPN1
R1 R3 R4 R5 R6 R18 R22 R23 R24: library part RES-1%, "高精度电阻"
R2 R9 R20 R41 R42 R51 R52 R53 R85 R86 R88 R89 R90 R94 R95 R97 R106 R107 R111 R113 R115 R116 R117 R118 R120: library part RES1
R7 R8 R10 R11 R12 R13 R14 R15 R16 R17 R25 R26 R27 R28 R29 R30 R31 R32 R33 R34 R35 R36 R37 R38 R39 R40 R43 R44 R45 R46 R47 R48 R49 R50 R54 R55 R56 R57 R58 R59 R60 R61 R62 R63 R64 R65 R66 R67 R68 R69 R70 R72 R73 R74 R75 R76 R77 R78 R79 R80 R81 R87 R91 R92 R93 R96 R99 R101 R102 R103 R104: library part Res
R19 R21: library part R
R71 R82 R83 R84: library part RESISTOR, "Resistor"
RN1: library part RESPACK
U2: "STM32 ARM-based 32-bit MCU with 64 Kbytes Flash, 100-pin LQFP, Industrial Temperature"
U3: library part 24C256
U4: "实时时钟"
U5 U6 U7 U8 U9 U10 U11 U12 U15 U16 U17 U18 U19 U20 U21 U22: library part TLP521, "光耦"
U13: "3A开关电源芯片"
U27: "手机SIM卡"
Y1 Y2 Y3: library part XTAL, "Crystal Oscillator"
Y4 Y5: library part CRYSTAL

## Free pads (board coordinates)
  round 1 hole 0.7: 0(197.1,104)
  round 0.5 hole 0.3: 0(211.2,117.5) 1(213,117.5) 2(213,116.6) 3(211.2,116.6) 4(211.2,114.4) 5(213,114.4) 6(213,113.4) 7(211.2,113.4) 8(212.1,113.9) 9(212.1,117.1)
  round 1 smd: ""(142.309,98.026) ""(178.079,110.134) ""(178.968,115.5) ""(212.623,94.9)

## Via types
v1: diameter 0.5, hole 0.3, Top Layer to Bottom Layer, tented both sides, 771 vias
v2: diameter 0.7, hole 0.5, Top Layer to Bottom Layer, tented both sides, 29 vias
v3: diameter 1, hole 0.7, Top Layer to Bottom Layer, tented both sides, 3 vias

## Nets (pads, with @x,y where several pads share a name; then routed paths per layer and width w, separated by ;. In a path a pad name is that pad's centre, name@x,y a point inside that pad or via, vN(x,y) a via of type N, cw(c..) or ccw(c..) an arc to the next point about the centre after c; other vN are vias at no path point)
AD_IN1: R7.1 R8.2 U2.16 | length 53.4
  Top Layer w0.254: U2.16@157.918,91.416 160.791,91.416 163.432,94.057 163.432,99.774 164.525,100.867 176.233,100.867 180.1,97 v1(180.1,89.2) ; R8.2@187.363,81.57 R7.1@187.363,84.364
  Top Layer w0.5: v1(185.764,84.364) R7.1@187.363,84.364
  Bottom Layer w0.254: v1(180.1,89.2) 180.1,85 180.736,84.364 v1(185.764,84.364)
AD_IN2: R72.1 R73.2 U2.17 | length 49.5
  Top Layer w0.254: U2.17@157.918,91.916 160.566,91.916 162.924,94.274 162.924,100.072 164.227,101.375 176.925,101.375 181.3,97 181.3,85.124 182,84.424 R72.1@183.303,84.424 R73.2@183.303,81.63
BEEP: R19.1 U2.38 | length 80.1
  Top Layer w0.254: U2.38@150.368,97.466 150.368,130.468 150.7,130.8 193.7,130.8 194.564,131.664 R19.1@194.564,134.112
BOOT0: R9.1 R85.1 U2.94 | length 102.2
  Top Layer w0.3: U2.94@153.368,82.366 153.368,75.74 v1(154.432,74.676) R9.1@155.956,74.676 ; v1@163.876,74.676 v1(163.881,74.676) 166.424,74.676 168,73.1 168,31.466 169.164,30.302 169.164,20.244 170.002,19.406 186.233,19.406 187.452,20.625 R85.1@187.452,26.416
  Bottom Layer w0.3: v1(154.432,74.676) v1(163.881,74.676)
BOOT1: R2.1 U2.37 | length 8.6
  Top Layer w0.254: 150.868,98.747 U2.37@150.868,97.466 150.868,102.468 151.524,103.124 R2.1@152.908,103.124
CH340D+: R113.1 U23.5 | length 23.2
  Top Layer w0.4: v1(176.717,36.306) U23.5@176.717,37.892 ; v1(177.4,18.161) 177.4,16.116 R113.1@178.176,15.34
  Bottom Layer w0.4: v1(176.717,36.306) 177.4,35.623 v1(177.4,18.161)
CH340D-: R111.1 U23.6 | length 23.4
  Top Layer w0.254: 176.35,16.055 176.4,16.104
  Top Layer w0.4: v1@175.447,36.382 U23.6@175.447,37.892
  Top Layer w0.5: R111.1@175.636,15.34 176.301,16.005 176.4,16.005 176.4,16.104 v1(176.4,18.186)
  Bottom Layer w0.5: v1(175.412,36.347) 176.4,35.36 v1(176.4,18.186)
CPU_IN1: R43.1 U2.78 U5.4 | length 99.3
  Top Layer w0.254: R43.1@62.992,58.928 62.992,65.278 64.211,66.497 130.378,66.497 145.368,81.487 U2.78@145.368,82.366
  Top Layer w0.5: U5.4@62.844,55.768 R43.1@62.844,58.78
CPU_IN2: R44.1 U2.79 U6.4 | length 93.1
  Top Layer w0.254: R44.1@69.448,59.076 69.448,64.952 70.485,65.989 130.505,65.989 145.868,81.352 U2.79@145.868,82.366
  Top Layer w0.5: U6.4@69.596,55.916 R44.1@69.596,58.928
CPU_IN3: R45.1 U2.80 U7.4 | length 86.9
  Top Layer w0.254: U7.4@76.052,55.768 R45.1@76.052,58.78 ; R45.1@76.2,58.78 R45.1@76.2,58.928 76.2,64.186 77.495,65.481 130.759,65.481 146.368,81.09 U2.80@146.368,82.366
CPU_IN4: R46.1 U2.81 U8.4 | length 80.6
  Top Layer w0.254: R46.1@82.804,58.928 82.804,63.906 83.795,64.897 130.937,64.897 146.868,80.828 U2.81@146.868,82.366
  Top Layer w0.5: U8.4@82.804,55.916 R46.1@82.804,58.928
CPU_IN5: R47.1 U2.82 U9.4 | length 74.3
  Top Layer w0.254: R47.1@89.408,58.928 89.408,63.348 90.322,64.262 131.089,64.262 147.368,80.541 U2.82@147.368,82.366
  Top Layer w0.5: U9.4@89.408,55.916 R47.1@89.408,58.928
CPU_IN6: R48.1 U2.83 U10.4 | length 68.2
  Top Layer w0.254: R48.1@96.012,58.928 96.012,63.043 96.622,63.652 131.242,63.652 147.868,80.279 U2.83@147.868,82.366
  Top Layer w0.5: U10.4@96.012,55.916 R48.1@96.012,58.928
CPU_IN7: R49.1 U2.84 U11.4 | length 61.8
  Top Layer w0.254: R49.1@102.616,58.928 102.616,62.357 103.403,63.144 131.47,63.144 148.368,80.042 U2.84@148.368,82.366
  Top Layer w0.5: U11.4@102.616,55.916 R49.1@102.616,58.928
CPU_IN8: R50.1 U2.85 U12.4 | length 55.5
  Top Layer w0.254: R50.1@109.22,58.928 109.22,61.773 110.058,62.611 131.699,62.611 148.868,79.78 U2.85@148.868,82.366
  Top Layer w0.5: U12.4@109.22,55.916 R50.1@109.22,58.928
CPU_IN9: R74.1 U2.86 U15.4 | length 49.5
  Top Layer w0.254: R74.1@115.824,58.928 115.722,59.03 115.722,61.316 116.434,62.027 131.902,62.027 149.368,79.493 U2.86@149.368,82.366
  Top Layer w0.5: U15.4@115.824,55.916 R74.1@115.824,58.928
CPU_IN10: R75.1 U2.87 U16.4 | length 43.3
  Top Layer w0.254: R75.1@122.428,58.928 122.428,60.884 123.038,61.493 132.182,61.493 149.868,79.18 U2.87@149.868,82.366
  Top Layer w0.5: U16.4@122.428,55.756 R75.1@122.428,58.928
CPU_IN11: R76.1 U2.88 U17.4 | length 36.8
  Top Layer w0.254: R76.1@129.032,58.928 129.032,60.198 129.87,61.036 132.436,61.036 150.368,78.969 U2.88@150.368,82.366
  Top Layer w0.5: U17.4@129.032,55.916 R76.1@129.032,58.928
CPU_IN12: R77.1 U2.91 U18.4 | length 33.2
  Top Layer w0.254: R77.1@135.636,58.928 135.636,63.424 151.868,79.656 U2.91@151.868,82.366
  Top Layer w0.5: U18.4@135.636,55.916 R77.1@135.636,58.928
CPU_IN13: R78.1 U2.95 U19.4 | length 48.3
  Top Layer w0.254: R78.1@142.24,58.928 142.24,61.493 143.053,62.306 158.775,62.306 159.995,63.525 159.995,75.26 158.699,76.556 154.432,76.556 153.868,77.12 U2.95@153.868,82.366
  Top Layer w0.5: U19.4@142.092,55.768 142.24,55.916 R78.1@142.24,58.928
CPU_IN14: R79.1 U2.96 U20.4 | length 42.2
  Top Layer w0.254: R79.1@148.844,58.928 148.844,61.366 149.276,61.798 159.055,61.798 160.503,63.246 160.503,75.471 158.91,77.064 154.711,77.064 154.368,77.407 U2.96@154.368,82.366
  Top Layer w0.5: U20.4@148.696,55.768 148.844,55.916 R79.1@148.844,58.928
CPU_IN15: R80.1 U2.97 U21.4 | length 35.8
  Top Layer w0.254: U2.97@154.868,82.366 154.868,77.999 155.296,77.572 159.12,77.572 161.011,75.681 161.011,62.814 159.41,61.214 155.931,61.214 155.448,60.731 R80.1@155.448,58.928 155.448,55.916 U21.4@155.3,55.768
CPU_IN16: R81.1 U2.98 U22.4 | length 31.6
  Top Layer w0.254: U2.98@155.368,82.366 155.368,78.464 155.677,78.156 159.309,78.156 161.569,75.895 161.569,59.411 R81.1@162.052,58.928
  Top Layer w0.5: U22.4@161.904,55.768 162.052,55.916 R81.1@162.052,58.928
CPU_JDQ1: C65.1 Q9.1 R99.2 U2.63 | length 179.2
  Top Layer w0.3: R99.2@12.192,32.986 12.192,67.005 15.621,70.434 113.919,70.434 133.401,89.916 U2.63@142.818,89.916
  Top Layer w0.5: R99.2@12.192,32.986 12.226,33.02 Q9.1@17.272,33.02
CPU_JDQ2: C66.1 Q10.1 R101.2 U2.64 | length 168.6
  Top Layer w0.254: R101.2@23.352,32.978 R101.2@23.47,32.978
  Top Layer w0.3: R101.2@23.352,32.978 23.352,68.005 25.044,69.698 114.173,69.698 133.891,89.416 U2.64@142.818,89.416
  Top Layer w0.5: R101.2@23.352,32.978 23.394,33.02 Q10.1@28.448,33.02
CPU_JDQ3: C67.1 Q11.1 R102.2 U2.65 | length 155.4
  Top Layer w0.254: R102.2@35.228,32.97 R102.2@35.331,32.97
  Top Layer w0.3: R102.2@35.228,32.97 35.228,66.572 37.795,69.139 114.833,69.139 ; 114.833,69.266 134.484,88.916 U2.65@142.818,88.916
  Top Layer w0.5: R102.2@35.228,32.97 35.278,33.02 Q11.1@40.132,33.02
CPU_JDQ4: C68.1 Q12.1 R104.2 U2.66 | length 144.2
  Top Layer w0.254: R104.2@46.392,32.974 R104.2@46.507,32.974
  Top Layer w0.3: R104.2@46.392,32.974 46.392,66.814 48.057,68.478 115.164,68.478 135.101,88.416 U2.66@142.818,88.416
  Top Layer w0.5: R104.2@46.438,33.02 Q12.1@51.308,33.02
DS_IO: U2.58 U4.6 | length 48.9
  Top Layer w0.254: U4.6@124.086,123.805 137.668,123.805 139.141,122.332 139.141,93.066 139.791,92.416 U2.58@142.818,92.416
DS_RST: U2.59 U4.5 | length 48.4
  Top Layer w0.254: U4.5@124.117,122.504 U4.5@124.086,122.535 137.688,122.535 138.532,121.691 138.532,92.761 139.376,91.916 U2.59@142.818,91.916
DS_SCLK: U2.57 U4.7 | length 49.7
  Top Layer w0.254: U4.7@124.086,125.075 138.176,125.075 ; 138.176,124.999 139.675,123.5 139.675,93.37 140.129,92.916 U2.57@142.818,92.916